# Altium PCB adc08200.PcbDoc
Units mm, origin at the board's own origin, x right, y up, seen from the top; angles counter-clockwise.
Board outline 60 x 33 mm, 2 copper layers (Top Layer, Bottom Layer); 45 components, 30 nets, 139 pads, 13 vias.
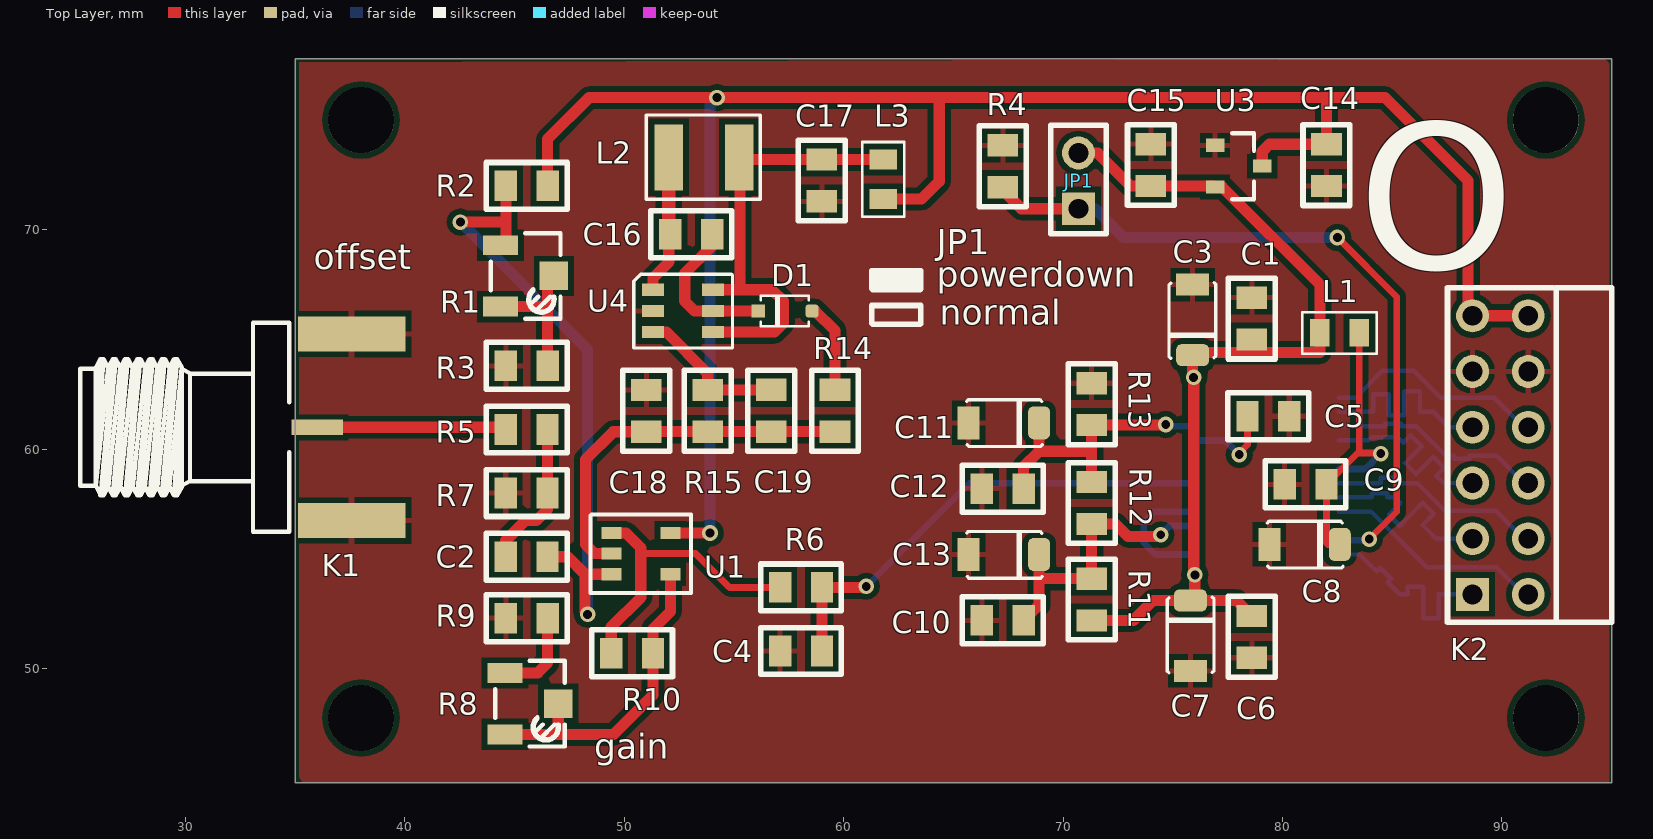
[diagram p0: Top Layer view]
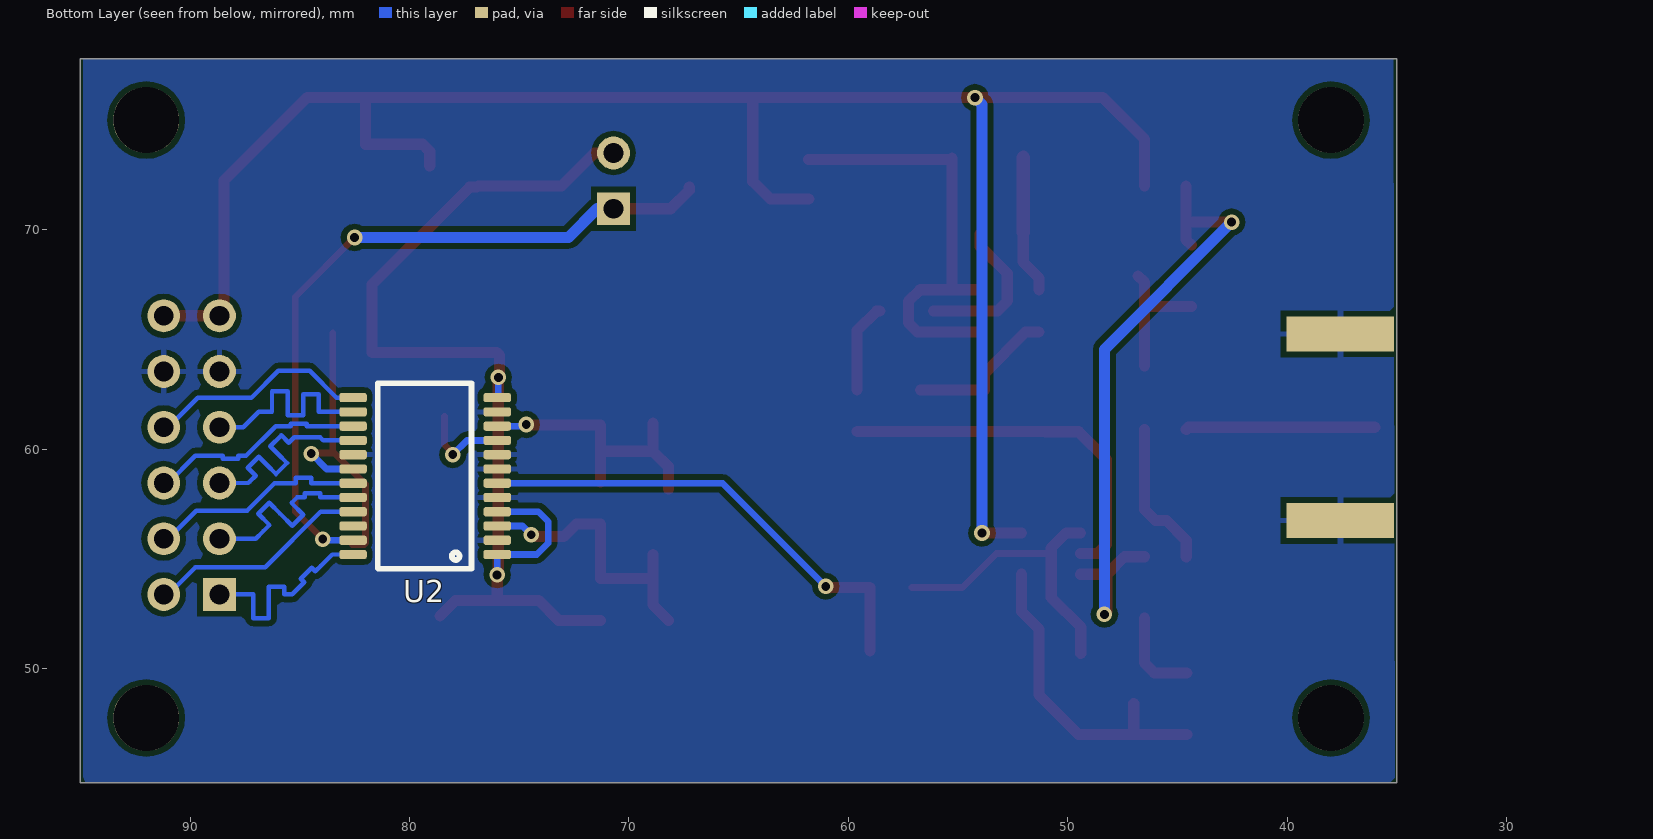
[diagram p1: Bottom Layer view, seen from below]

## Layer stack, top to bottom
Top Solder: solder mask 0.0102, Solder Resist, Dk 3.5
Top Layer: signal copper 0.0356
Dielectric 1: dielectric 0.32, FR-4, Dk 4.8
Bottom Layer: signal copper 0.0356
Bottom Solder: solder mask 0.0102, Solder Resist, Dk 3.5

## Board outline
35,44.8 95,44.8 95,77.8 35,77.8

## Design rules (kind name [scope] priority, off if disabled: settings)
Clearance Clearance_poly [InPolygon] p1: gap=0.254
Clearance Clearance_1 [All] p2: gap=0.15
HoleSize [All] p1: absolutevalues=TRUE maxlimit=3.54 minlimit=0.025 maxpercent=80.000 minpercent=20.000
MatchedLengths data [InNetClass('data')] p1: tolerance=0.254 checknetsindiffpair=FALSE checkdiffpairvsdiffpair=TRUE checkxsignals=TRUE checkothers=TRUE
MinimumSolderMaskSliver [All] p1: minsoldermaskwidth=0
PolygonConnect [All] p1: connectstyle=Relief reliefconductorwidth=0.254 reliefentries=4 polygonreliefangle="90 Angle" airgapwidth=0.254
RoutingVias [All] p1: holewidth=0.711 width=1.27 viastyle="Through Hole" minholewidth=0.254 minwidth=0.711 maxholewidth=0.711 maxwidth=1.27
SilkToSolderMaskClearance [IsPad] p1: minsilkscreentomaskgap=0.102 clearancetoexposedcopper=TRUE
SolderMaskExpansion [All] p1: expansion=0.102
Width [All] p1: maxlimit=2.54 minlimit=0.16 preferedwidth=0.254
27 further rules are at their usual default settings.

## Classes and differential pairs
net class data: CLK D1 D2 D3 D4 D5 D6 D7

## Components (designator, comment, footprint, x,y, rotation, side; value= is the part's Value field where it differs from the comment)
C1 "cap0805" SM0805 78.6,66.905 r270 top
C2 "cap0805" SM0805 44.595,55.1 r0 top
C3 "CAP_POL_SMA" "CAP_POL_SMA (3216)" 75.9,64.294 r90 top
C4 "cap0805" SM0805 57.1,50.8 r0 top
C5 "cap0805" SM0805 80.305,61.5 r180 top
C6 "cap0805" SM0805 78.6,50.495 r90 top
C7 "CAP_POL_SMA" "CAP_POL_SMA (3216)" 75.8,53.1 r270 top
C8 "CAP_POL_SMA" "CAP_POL_SMA (3216)" 82.606,55.659 r180 top
C9 "cap0805" SM0805 80.095,58.4 r0 top
C10 "cap0805" SM0805 66.295,52.2 r0 top
C11 "CAP_POL_SMA" "CAP_POL_SMA (3216)" 68.9,61.2 r180 top
C12 "cap0805" SM0805 66.295,58.2 r0 top
C13 "CAP_POL_SMA" "CAP_POL_SMA (3216)" 68.9,55.2 r180 top
C14 "cap0805" SM0805 82,71.995 r90 top
C15 "cap0805" SM0805 74,73.905 r270 top
C16 "cap0805" SM0805 54,69.8 r180 top
C17 "cap0805" SM0805 59,71.295 r90 top
C18 "cap0805" SM0805 51,62.7 r270 top
C19 "cap0805" SM0805 56.7,60.8 r90 top
D1 "DiodeShottky_SOD323" SOD323 58.425,66.3 r180 top
JP1 "JUMPER2" JUMPER2 70.7,70.96 r180 top
K1 "SMA_Edge" AMPHENOL_132357-11 36,61 r0 top
K2 "PMOD_6x2_right_angle" PMOD_6x2_right_ANGLE 88.66,53.38 r90 top
L1 "75R@100MHz" "SM_0805_INDUCTANCE _3D" 82.6,65.3 r180 top
L2 "inductance SMT 3.2x4.5 mm" inductor_LQH43PN 52.3,73.3 r90 top
L3 "75R@100MHz" "SM_0805_INDUCTANCE _3D" 61.8,72.3 r90 top
R1 "res_var_SMT" TRIM_BOURNS_3223W 45.5,67.9 r270 top
R2 "res0805_EU" SM0805 46.505,72 r180 top
R3 "res0805_EU" SM0805 46.505,63.8 r180 top
R4 "res0805_EU" SM0805 67.25,71.945 r90 top
R5 "res0805_EU" SM0805 44.595,60.9 r0 top
R6 "res0805_EU" SM0805 57.1,53.7 r0 top
R7 "res0805_EU" SM0805 44.595,58 r0 top
R8 "res_var_SMT" TRIM_BOURNS_3223W 45.7,48.4 r270 top
R9 "res0805_EU" SM0805 44.6,52.3 r0 top
R10 "res0805_EU" SM0805 51.305,50.7 r180 top
R11 "res0805_EU" SM0805 71.3,52.195 r90 top
R12 "res0805_EU" SM0805 71.3,56.595 r90 top
R13 "res0805_EU" SM0805 71.3,61.1 r90 top
R14 "res0805_EU" SM0805 59.6,62.705 r270 top
R15 "res0805_EU" SM0805 53.8,62.7 r270 top
U1 "LMH6723" SOT-23_5 49.411,56.18 r270 top
U2 "ADC08200" SSOP-24 77.47,55.2 r0 bottom
U3 "XC6206" SOT-23 78,72.9 r0 top
U4 "LT3483" SOT-23_6 51.3,67.266 r270 top

## Footprints (in the part's own frame and the unit in brackets; to place one, negate y for a bottom-side part, rotate by r counter-clockwise, add the part's x,y. Pads: shape width x height; smd on the part's side, far side on the other; paste and mask are expansions set on the pad)
AMPHENOL_132357-11 [mm]
  rect 2.35x0.7 smd: 1(0,0)
  rect 4.9x1.6 smd: 2(1.575,-4.25) 2(1.575,4.25)
  rect 4.9x1.6 smd far side: 2(1.575,-4.25) 2(1.575,4.25)
  silkscreen extent -10.81,-4.76 -1.28,4.76, body extent -10.8,-4.76 3.48,4.76, height 4.08
"CAP_POL_SMA (3216)" [mm] "tantalum capacitor SMA"
  rrect50% 1x1.5 smd: 1(-0.004,0)
  rect 1x1.5 smd: 2(3.206,0)
  silkscreen extent -0.15,-1.05 3.3,1.08
inductor_LQH43PN [mm] "inductor"
  rect 3x1.3 smd: 1(0,-2.941) 2(0,0.275)
  silkscreen extent -1.91,-3.9 1.93,1.3
JUMPER2 [mm]
  rect 1.5x1.5 hole 0.9: 1(0,0)
  round 1.5 hole 0.9: 2(0,-2.54)
  silkscreen extent -1.27,-3.81 1.27,1.14
PMOD_6x2_right_ANGLE [mm] "2.54 mm right angle 6x2 pins"
  rect 1.5x1.5 hole 0.9: 1(0,0)
  round 1.5 hole 0.9: 2(2.54,0) 3(5.08,0) 4(7.62,0) 5(10.16,0) 6(12.7,0) 7(0,-2.54) 8(2.54,-2.54) 9(5.08,-2.54) 10(7.62,-2.54) 11(10.16,-2.54) 12(12.7,-2.54)
  silkscreen extent -1.27,-6.35 13.97,1.14
SM0805 [mil]
  rect 40x55 smd: 1(0,0) 2(75,0)
  silkscreen extent -35,-42 110,42
"SM_0805_INDUCTANCE _3D" [mm] "chip inductanse 0805 inch"
  rect 0.9x1.25 smd: 1(-0.9,0) 2(0.9,0)
  silkscreen extent -1.7,-0.95 1.7,0.95, body extent -1.1,-0.7 1.1,0.7, height 1.1
SOD323 [mm] "SOD323"
  rrect50% 0.6x0.6 smd: 1(-0.125,0)
  rect 0.6x0.6 smd: 2(2.325,0)
  silkscreen extent 0.03,-0.7 2.2,0.7, body extent 0.25,-0.7 2.05,0.7, height 1.15
SOT-23 [mm] "SOT23_L from misc devices"
  rect 0.85x0.6 smd: 1(-1.075,0.95) 2(-1.075,-0.95) 3(1.075,0)
  silkscreen extent -0.3,-1.5 0.7,1.5, body extent -0.7,-1.5 0.7,1.5, height 1.1
SOT-23_5 [mm]
  rect 0.55x0.9 smd: 1(0,0) 2(0.94,0) 3(1.88,0) 4(1.88,2.689) 5(0,2.689)
  silkscreen extent -0.84,-0.95 2.74,3.62
SOT-23_6 [mm]
  rect 0.55x1 smd: 1(0,0) 2(0.966,0) 3(1.932,0) 4(1.932,2.74) 5(0.966,2.743) 6(0,2.743)
  silkscreen extent -0.71,-0.87 2.65,3.63
SSOP-24 [mm]
  rrect50% 1.25x0.42 smd: 1(-1.47,0) 2(-1.47,-0.65) 3(-1.47,-1.3) 4(-1.47,-1.95) 5(-1.47,-2.6) 6(-1.47,-3.25) 7(-1.47,-3.9) 8(-1.47,-4.55) 9(-1.47,-5.2) 10(-1.47,-5.85) 11(-1.47,-6.5) 12(-1.47,-7.15) 13(5.1,-7.15) 14(5.1,-6.5) 15(5.1,-5.85) 16(5.1,-5.2) 17(5.1,-4.55) 18(5.1,-3.9) 19(5.1,-3.25) 20(5.1,-2.6) 21(5.1,-1.95) 22(5.1,-1.3) 23(5.1,-0.65) 24(5.1,0)
  silkscreen extent -0.3,-7.8 3.98,0.65
TRIM_BOURNS_3223W [mm]
  rect 0.9x1.6 smd: 1(-1.4,-1.14) 3(1.4,-1.14)
  rect 1.3x1.3 smd: 2(0,1.29)
  silkscreen extent -1.95,-1.59 1.95,1.59, body extent -1.95,-1.81 1.95,1.81, height 4.16

## Part data
C1 C2 C4 C5 C6 C9 C10 C12 C14 C15 C16 C17 C18 C19: "Capacitor"
C3 C7 C8 C11 C13: "CAP_POL_SMA(3216)"
D1: "SOD323"
L1 L3: "chip inductance"
L2: library part inductor_LQH43PN
R1 R8: "Trimmer  Bourns  3223W"
R2 R3 R4 R5 R6 R7 R9 R10 R11 R12 R13 R14 R15: "Resistor"
U1: "current feedback OPAMP"
U2: "soic28 with thermalpad"
U3: "SOT-23-3 ldo"
U4: "dc/dc tsot23-6"

## Free pads (board coordinates)
  round 3 hole 3: 0(38,47.75) 0(38,75) 0(92,47.75) 0(92,75)

## Via types
v1: diameter 0.711, hole 0.406, Top Layer to Bottom Layer, 13 vias

## Nets (pads, with @x,y where several pads share a name; then routed paths per layer and width w, separated by ;. In a path a pad name is that pad's centre, name@x,y a point inside that pad or via, vN(x,y) a via of type N, cw(c..) or ccw(c..) an arc to the next point about the centre after c; other vN are vias at no path point)
+3.3V: C14.2 K2.6 K2.12 L3.1 R2.1 U1.5 U3.3 | length 89.6
  Top Layer w0.508: R2.1 46.505,74.13 48.4,76.025 64.275,76.025 ; U1.5 v1(53.905,56.18) v1@53.925,56.2 ; L3.1 63.55,71.4 64.35,72.2 64.35,75.95 64.275,76.025 ; U3.3 79.075,73.575 79.4,73.9 C14.2 82,75.875 81.85,76.025 ; K2.12@91,66.08 K2.6 88.46,66.08 88.46,72.24 84.675,76.025 81.85,76.025 ; 64.275,76.025 81.85,76.025
  Bottom Layer w0.508: v1(53.905,56.18) 53.905,75.705 v1(54.225,76.025)
+3V: C1.2 C3.1 C6.2 C7.1 C15.2 JP1.2 L1.2 R11.1 U2.1 U2.4 U2.12 U3.2 | length 49.6
  Top Layer w0.305: C7.1 C7.1@76,53.304
  Top Layer w0.508: JP1.2 71.575,73.5 73.075,72 C15.2 76.875,72 U3.2 77.25,71.95 81.7,67.5 L1.2 81.7,64.4 76.01,64.4 C3.1 v1@75.9,63.25 ; R11.1 73.195,52.195 74.104,53.104 C7.1 77.896,53.104 C6.2 ; v1(75.95,63.275) 75.95,54.325 v1(76,54.275) C7.1@76,53.304
  Bottom Layer w0.305: v1(75.95,63.275) 75.95,62.4 U2.12 ; v1@76,54.25 v1(76,54.275) U2.1 74.2,55.2 73.675,55.725 73.675,56.7 74.125,57.15 U2.4
-3.3V: C18.2 C19.1 R14.2 R15.2 U1.2 | length 17.1
  Top Layer w0.508: U1.2 48.635,55.24 48.225,55.65 48.225,59.525 49.495,60.795 C18.2 51.005,60.8 C19.1 R14.2
CLK: K2.1 U2.24 | length 10
  Bottom Layer w0.203: U2.24 83.525,55.2 84.036,54.689 84.287,54.438 84.45,54.6 84.952,54.097 84.79,53.935 85.293,53.432 85.345,53.38 85.701,53.38 85.701,53.739 86.412,53.739 86.412,53.38 86.412,52.294 87.123,52.294 87.123,53.38 87.576,53.38 K2.1@88.46,53.38
D1: K2.7 U2.21 | length 10
  Bottom Layer w0.203: U2.21 84.05,57.15 86.575,54.625 89.755,54.625 K2.7@91,53.38
D2: K2.2 U2.20 | length 10
  Bottom Layer w0.203: U2.20 83.7,57.8 84.056,57.8 84.056,57.986 84.767,57.986 84.767,57.8 85.125,57.8 85.376,57.549 84.842,57.014 85.345,56.511 85.879,57.046 86.389,57.555 86.891,57.052 86.382,56.543 86.675,56.25 87.005,55.92 K2.2@88.46,55.92
D3: K2.8 U2.19 | length 10
  Bottom Layer w0.203: U2.19 84.125,58.45 84.481,58.45 84.481,58.707 85.192,58.707 85.192,58.45 85.3,58.45 86.15,58.45 87.4,57.2 89.72,57.2 K2.8@91,55.92
D4: K2.3 U2.16 | length 10
  Bottom Layer w0.203: U2.16 83.925,60.4 84.075,60.55 85.25,60.55 85.501,60.299 85.836,60.633 86.339,60.13 86.004,59.796 85.578,59.37 86.081,58.867 86.507,59.293 86.869,59.654 87.372,59.151 87.01,58.79 87.275,58.525 87.34,58.46 K2.3@88.46,58.46
D5: K2.9 U2.15 | length 10
  Bottom Layer w0.203: U2.15 84.335,61.05 84.691,61.05 84.691,61.152 85.402,61.152 85.402,61.05 86.1,61.05 87.45,59.7 87.806,59.7 87.806,59.557 88.517,59.557 88.517,59.7 88.725,59.7 89.76,59.7 K2.9@91,58.46
D6: K2.4 U2.14 | length 10
  Bottom Layer w0.203: U2.14 83.775,61.7 84.131,61.7 84.131,62.512 84.842,62.512 84.842,61.7 84.842,61.548 85.553,61.548 85.553,61.7 85.553,62.642 86.264,62.642 86.264,61.7 86.575,61.7 86.875,61.7 87.575,61 K2.4@88.46,61
D7: K2.10 U2.13 | length 10
  Bottom Layer w0.203: U2.13 83.325,62.35 84.55,63.575 85.975,63.575 87.2,62.35 89.65,62.35 K2.10@91,61
GND: C1.1 C3.2 C4.1 C5.1 C6.1 C7.2 C8.2 C9.1 C10.1 C11.2 C12.1 C13.2 C14.1 C15.1 C17.1 C18.1 K1.2 K2.5 K2.11 R3.2 R4.2 R7.1 R9.1 R13.2 U2.2 U2.5 U2.7 U2.8 U2.11 U2.17 U3.1 U4.2
NetC2_1: C2.1 R5.2 R7.2 | length 6.9
  Top Layer w0.508: C2.1 44.595,55.845 45.5,56.75 46,56.75 46.5,57.25 R7.2 R5.2
NetC2_2: C2.2 R1.1 R2.2 U1.3 | length 30.3
  Top Layer w0.508: v1(42.525,70.35) 44.6,70.35 ; R1.1 44.6,69.54 44.6,70.35 ; R2.2 44.6,70.35 ; C2.2 47.4,55.1 48.2,54.3 ; v1(48.325,52.475) 48.2,52.6 48.2,54.3 ; U1.3 48.2,54.3
  Bottom Layer w0.508: v1(42.525,70.35) 48.325,64.55 v1(48.325,52.475)
NetC4_2: C4.2 R6.2 U2.6 | length 21.7
  Top Layer w0.508: C4.2 R6.2 60.85,53.7 v1@60.875,53.675
  Bottom Layer w0.305: v1(61.025,53.75) 65.725,58.45 U2.6
NetC5_2: C5.2 U2.9 | length 4.2
  Top Layer w0.305: v1@77.975,59.775 78.4,60.2 C5.2
  Bottom Layer w0.305: U2.9 77.375,60.4 v1(78.025,59.75)
NetC8_1: C8.1 C9.2 L1.1 U2.18 | length 14
  Top Layer w0.305: C8.1 82.066,55.659 82,55.725 C9.2 83.425,59.825 83.5,59.825 ; L1.1 83.5,59.825 ; v1@84.425,59.825 83.5,59.825
  Bottom Layer w0.305: U2.18 83.775,59.1 v1(84.475,59.8)
NetC16_1: C16.1 D1.2 U4.5 | length 7.1
  Top Layer w0.508: C16.1 54,69.25 52.75,68 52.75,66.75 53.2,66.3 U4.5 D1.2
NetC16_2: C16.2 L2.2 U4.1 | length 6.3
  Top Layer w0.508: U4.1 51.3,67.8 52.025,68.525 C16.2@52.025,69.87
  Top Layer w0.635: C16.2@52.025,69.87 L2.2
NetC17_2: C17.2 L2.1 L3.2 U4.4 U4.6 | length 20.4
  Top Layer w0.508: U4.4 56.834,65.334 57.25,65.75 57.25,66.75 56.734,67.266 55.266,67.266 ; U4.6 55.266,67.266 ; L3.2 C17.2 55.341,73.2 55.266,73.275 55.266,67.266
NetC19_2: C19.2 R15.1 U4.3 | length 6.9
  Top Layer w0.508: U4.3 51.916,65.334 53.8,63.45 R15.1 56.695,62.7 C19.2
NetD1_1: D1.1 R14.1 | length 4.1
  Top Layer w0.508: D1.1 58.7,66.3 59.6,65.4 R14.1
NetJP1_1: JP1.1 R4.1 U2.23 | length 33
  Top Layer w0.305: v1(82.5,69.65) 85.2,66.95 85.2,57.15 v1(83.95,55.9)
  Top Layer w0.508: R4.1 67.25,71.8 68.09,70.96 JP1.1
  Bottom Layer w0.305: U2.23 v1@83.925,55.85
  Bottom Layer w0.508: JP1.1 71.44,70.96 72.75,69.65 v1(82.5,69.65)
NetK1_1: K1.1 R5.1 | length 8.6
  Top Layer w0.508: K1.1 44.495,61 R5.1
NetR1_2: R1.2 R1.3 R3.1 | length 6.4
  Top Layer w0.508: R1.3 46.505,66.5 ; R3.1 46.505,66.5 ; R1.2 46.505,67.615 46.505,66.5
NetR6_1: R6.1 R10.2 U1.1 | length 13.7
  Top Layer w0.305: 51,55.25 53.25,55.25 54.8,53.7 R6.1
  Top Layer w0.508: R10.2 49.4,51.9 50.75,53.25 50.75,55.5 50.07,56.18 U1.1
NetR8_1: R8.1 R9.2 | length 4.2
  Top Layer w0.508: R8.1 46.05,49.8 46.505,50.255 R9.2
NetR8_2: R8.2 R8.3 R10.1 U1.4 | length 14.7
  Top Layer w0.508: R8.3 47.03,47 ; R8.2 46.99,47.04 47.03,47 ; U1.4 52.1,52.6 51.305,51.805 R10.1 51.305,48.805 49.5,47 47.03,47
RB: C11.1 C12.2 R12.2 R13.1 U2.10 | length 12.9
  Top Layer w0.508: C12.2 68.2,59.2 68.904,59.904 ; C11.1 68.904,59.904 ; R12.2 71.3,60 ; v1@74.525,61.1 R13.1 71.3,60 ; 68.904,59.904 71.204,59.904 71.3,60
  Bottom Layer w0.305: v1(74.675,61.125) 74.75,61.05 U2.10
RT: C10.2 C13.1 R11.2 R12.1 U2.3 | length 13.1
  Top Layer w0.508: C10.2 68.904,52.904 68.904,54 ; C13.1 68.904,54 ; v1@74.175,56.025 72.95,56.025 72.38,56.595 R12.1 R11.2 69.004,54.1 68.904,54
  Bottom Layer w0.305: v1(74.45,56.1) 74.85,56.5 U2.3
pads on no net: U2.22

## Polygon pours and split planes (outlines as drawn)
GND on Bottom Layer "btm" (solid, remove dead copper, pour order 0): 35.15,77.775 94.875,77.775 94.875,44.85 94.825,44.8 94.775,44.85 35.1,44.85
GND on Top Layer "top" (solid, remove dead copper, pour order 2): 35.175,77.625 35.175,45.025 35,44.85 35.025,44.825 94.9,44.825 94.9,77.775 94.85,77.825

## Silkscreen, mask and mechanical layers (free items; w line width, h text height)
Top Overlay:
  lines w0.254: 61.3,67.875 63.4,67.875 63.45,67.825 61.35,67.825 61.325,67.8 61.325,67.575 63.425,67.575 63.425,67.375 63.35,67.45 61.45,67.45 ; 61.275,65.75 61.275,66.55 63.5,66.55 63.5,65.725 63.475,65.7 61.325,65.7 61.275,65.75 ; 61.275,67.325 61.325,67.275 63.475,67.275 63.5,67.3 63.5,68.125 61.275,68.125 61.275,67.325
  text "JP1" at 64.25,68.875 h1.14
  text "offset" at 35.85,68.2 h1.14
  text "powerdown" at 64.25,67.4 h1.14
  text "normal" at 64.375,65.675 h1.14
  text "O" at 83.425,65.35 h15
  text "gain" at 48.625,45.9 h1.14
Mechanical 1:
  lines w0.254: 35,44.7 35,77.9 95,77.9 95,44.7 35,44.7